# Altium PCB Pack_BMS_Module.PcbDoc
Units mm, origin at the board's own origin, x right, y up, seen from the top; angles counter-clockwise.
Board outline 100 x 100 mm, 2 copper layers (Top Layer, Bottom Layer); 94 components, 63 nets, 272 pads, 5 vias.
Unrouted connection lines stored in the file: 174.
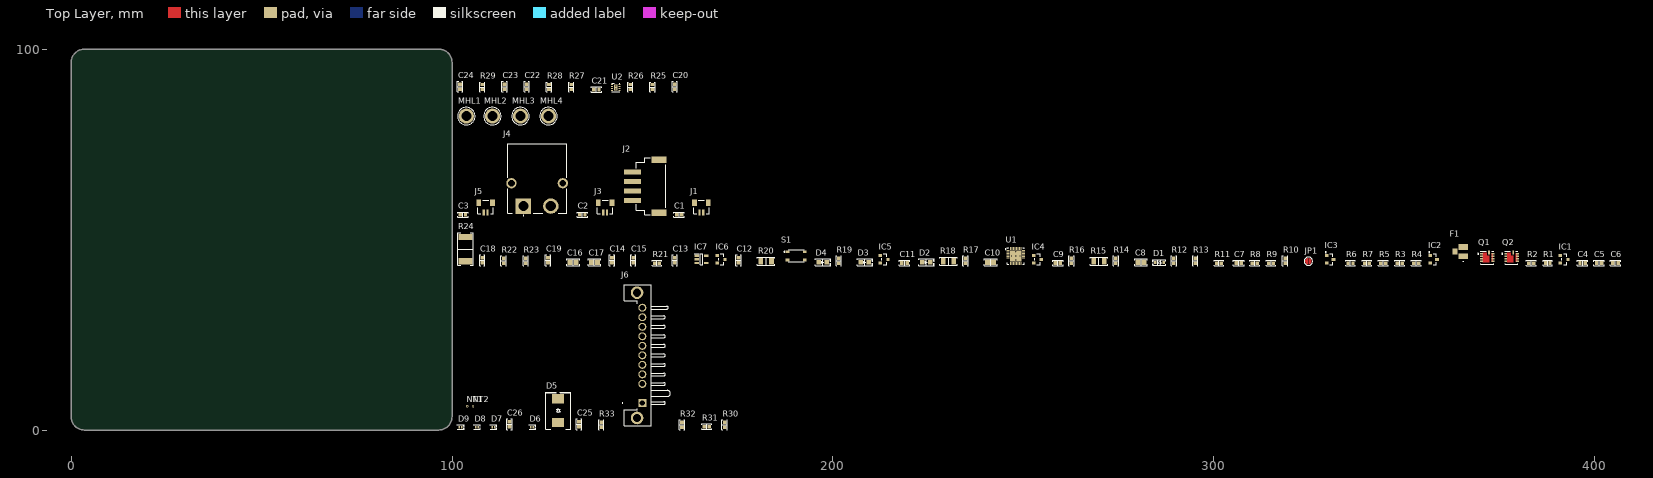
[diagram p0: Top Layer view]
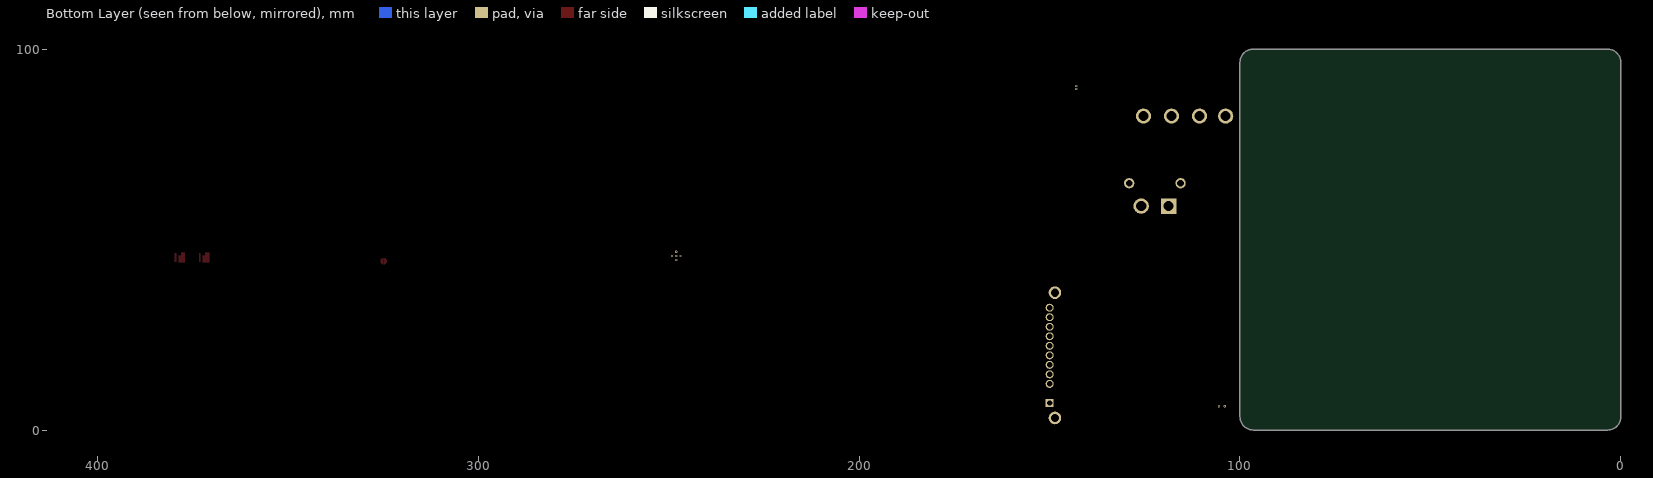
[diagram p1: Bottom Layer view, seen from below]

## Layer stack, top to bottom
Top Solder: solder mask 0.0102, Solder Resist, Dk 3.5
Top Layer: signal copper 0.0356
Dielectric 1: dielectric 0.32, FR-4, Dk 4.8
Bottom Layer: signal copper 0.0356
Bottom Solder: solder mask 0.0102, Solder Resist, Dk 3.5

## Board outline
0,3.479 0,96.521 cw(c3.479,96.521) 3.479,100 96.521,100 cw(c96.521,96.521) 100,96.521 100,3.479 cw(c96.521,3.479) 96.521,0 3.479,0 cw(c3.479,3.479)

## Design rules (kind name [scope] priority, off if disabled: settings)
BoardOutlineClearance [All] p1: gap=0.2 ignorepadtopadclearanceinfootprint=FALSE
Clearance "Stitching GND" [IsStitchingVia and InNet('GND') vs (IsVia and (Not IsStitchingVia)) Or IsPad] p1: gap=0.2 ignorepadtopadclearanceinfootprint=FALSE except(0.15: SMDPad-SMDPad; 0.28: Arc-Hole Track-Hole)
Clearance [All] p2: gap=0.2 ignorepadtopadclearanceinfootprint=FALSE except(0.15: SMDPad-SMDPad; 0.28: Arc-Hole Track-Hole)
HoleSize [All] p1: absolutevalues=TRUE maxlimit=6 minlimit=0.3 maxpercent=80.000 minpercent=20.000
HoleToHoleClearance HoleToHolePad [IsPad vs IsPad] p1: gap=0.45 allowstackedmicrovias=TRUE
HoleToHoleClearance HoleToHoleVia [IsVia vs IsVia] p2: gap=0.2 allowstackedmicrovias=TRUE
HoleToHoleClearance [All] p3: gap=0.3 allowstackedmicrovias=TRUE
MinimumAnnularRing MinimumViaAnnularRing [IsVia] p1: minimumring=0.15
MinimumAnnularRing [All] p2: minimumring=0.254
MinimumSolderMaskSliver [All] p1: minsoldermaskwidth=0.1
PlaneConnect [All] p1: planeconnectstyle=Relief reliefexpansion=0.508 reliefentries=4 reliefconductorwidth=0.32 reliefairgap=0.254
PolygonConnect MolexPwrGND [InNet('GND') vs IsPad And HasFootprint('43045-08YY_121314')] p1: connectstyle=Relief reliefconductorwidth=1 reliefentries=4 polygonreliefangle="90 Angle" conductorbypadedge=TRUE mindistance=0.381 enablemindistance=FALSE airgapwidth=0.35
PolygonConnect DRVTherrmalGND [InNet('GND') vs IsPad And HasFootprint('RXZ0016A-MFG')] p2: connectstyle=Direct reliefconductorwidth=0.254 reliefentries=4 polygonreliefangle="90 Angle" airgapwidth=0.254
PolygonConnect GNDStitchingDirect [InNet('GND')] p3: thpad.connectstyle=Relief thpad.reliefconductorwidth=0.32 thpad.reliefentries=4 thpad.polygonreliefangle="90 Angle" thpad.airgapwidth=0.254 thpad.conductorbypadedge=TRUE thpad.mindistance=0.381 thpad.enablemindistance=FALSE smdpad.connectstyle=Relief smdpad.reliefconductorwidth=0.32 smdpad.reliefentries=4 smdpad.polygonreliefangle="90 Angle" smdpad.airgapwidth=0.254 smdpad.conductorbypadedge=TRUE smdpad.mindistance=0.381 smdpad.enablemindistance=FALSE via.connectstyle=Direct via.reliefconductorwidth=0.254 via.reliefentries=4 via.polygonreliefangle="90 Angle" via.airgapwidth=0.254
PolygonConnect [All] p4: connectstyle=Relief reliefconductorwidth=0.32 reliefentries=4 polygonreliefangle="90 Angle" conductorbypadedge=TRUE mindistance=0.381 enablemindistance=FALSE airgapwidth=0.254
RoutingVias PowerVias [InNetClass('POWER') or InNet('GND')] p1: holewidth=0.5 width=0.8 viastyle="Through Hole" minholewidth=0.3 minwidth=0.6 maxholewidth=1.2 maxwidth=1.6
RoutingVias SignalVias [All] p2: holewidth=0.3 width=0.6 viastyle="Through Hole" minholewidth=0.3 minwidth=0.6 maxholewidth=0.5 maxwidth=0.8
SilkToSilkClearance [All] p1: silktosilkclearance=0.1
SilkToSolderMaskClearance [IsPad] p1: minsilkscreentomaskgap=0.1 clearancetoexposedcopper=TRUE
SolderMaskExpansion [All] p1: expansion=0.05 istentingtop=FALSE
SupplyNets "Schematic Supply Nets_5" [InNet('PACK+')] p1: voltage=12.60
SupplyNets "Schematic Supply Nets_4" [InNet('+3V3_LED')] p2: voltage=3.300
SupplyNets "Schematic Supply Nets_3" [InNet('GND')] p3: voltage=0.000
SupplyNets "Schematic Supply Nets_1" [InNet('PACK-')] p4: voltage=0.000
Width WidthPower [InNetClass('POWER') or InNet('GND')] p1: maxlimit=3 minlimit=0.2 preferedwidth=0.6
Width WidthSignal [All] p2: maxlimit=1 minlimit=0.2 preferedwidth=0.3
24 further rules are at their usual default settings.

## Classes and differential pairs
component class Pack_BMS_Module: MHL1 MHL2 MHL3 MHL4
net class TS[1..3]: TS1 TS2 TS3
component class SEC_PROT: C20 C21 C22 C23 C24 R25 R26 R27 R28 R29 U2
component class BATT_MGMT: C4 C5 C6 C7 C8 C9 C10 C11 C12 C13 C14 C15 C16 C17 C18 C19 D1 D2 D3 D4 F1 IC1 IC2 IC3 IC4 IC5 IC6 IC7 JP1 NT1 NT2 Q1 Q2 R1 R2 R3 R4 R5 R6 R7 R8 R9 R10 R11 R12 R13 R14 R15 R16 R17 R18 R19 R20 R21 R22 R23 R24 S1 U1
component class BATT_CONN: C25 C26 D5 D6 D7 D8 D9 J6 R30 R31 R32 R33
component class CELL_CONN: C1 C2 C3 J1 J2 J3 J4 J5

## Components (designator, comment, footprint, x,y, rotation, side; value= is the part's Value field where it differs from the comment)
C1 "100nF" "CAP 0603_1608" 159.639,56.515 r0 top
C2 "100nF" "CAP 0603_1608" 134.239,56.515 r0 top
C3 "100nF" "CAP 0603_1608" 102.87,56.515 r0 top
C4 "100nF" "CAP 0603_1608" 396.875,43.815 r0 top (schematic designator C6)
C5 "100nF" "CAP 0603_1608" 401.193,43.815 r0 top (schematic designator C7)
C6 "100nF" "CAP 0603_1608" 405.511,43.815 r0 top (schematic designator C8)
C7 "100nF" "CAP 0603_1608" 306.578,43.815 r0 top (schematic designator C9)
C8 "1µF" "CAP 0805_2012" 280.924,44.069 r0 top (schematic designator C10)
C9 "100nF" "CAP 0603_1608" 259.08,43.815 r0 top (schematic designator C11)
C10 "1µF" "CAP 0805_2012" 241.427,44.069 r0 top (schematic designator C12)
C11 "100nF" "CAP 0603_1608" 218.821,43.815 r0 top (schematic designator C13)
C12 "100nF" "CAP 0603_1608" 175.26,44.577 r90 top (schematic designator C14)
C13 "100nF" "CAP 0603_1608" 158.496,44.577 r90 top (schematic designator C15)
C14 "100nF" "CAP 0603_1608" 141.986,44.577 r90 top (schematic designator C16)
C15 "100nF" "CAP 0603_1608" 147.574,44.577 r90 top (schematic designator C17)
C16 "1µF" "CAP 0805_2012" 131.826,44.069 r0 top (schematic designator C18)
C17 "1µF" "CAP 0805_2012" 137.414,44.069 r0 top (schematic designator C19)
C18 "100nF" "CAP 0603_1608" 107.95,44.577 r90 top (schematic designator C20)
C19 "100nF" "CAP 0603_1608" 125.222,44.577 r90 top (schematic designator C21)
C20 "100nF" "CAP 0603_1608" 158.496,90.17 r90 top (schematic designator C22)
C21 "100nF" "CAP 0603_1608" 137.922,89.408 r0 top (schematic designator C23)
C22 "470nF" "CAP 0603_1608" 119.634,90.17 r90 top (schematic designator C24)
C23 "100nF" "CAP 0603_1608" 113.792,90.17 r90 top (schematic designator C25)
C24 "100nF" "CAP 0603_1608" 102.108,90.17 r90 top (schematic designator C26)
C25 "100nF" "CAP 0603_1608" 133.35,1.524 r90 top (schematic designator C4)
C26 "100nF" "CAP 0603_1608" 115.062,1.524 r90 top (schematic designator C5)
D1 "BAT54HT1G" "SOD323 IPC" 285.75,43.942 r0 top (schematic designator D6)
D2 "LED" "LED 0805_2012" 224.536,44.069 r0 top (schematic designator D7)
D3 "LED" "LED 0805_2012" 208.407,44.069 r0 top (schematic designator D8)
D4 "LED" "LED 0805_2012" 197.358,44.069 r0 top (schematic designator D9)
D5 "SMCJ13A" "DO214AB SMC" 127.889,5.08 r90 top (schematic designator D1)
D6 "TPD1E10B06DPYR" 0402 121.031,0.762 r0 top (schematic designator D2)
D7 "TPD1E10B06DPYR" 0402 110.871,0.762 r0 top (schematic designator D3)
D8 "TPD1E10B06DPYR" 0402 106.553,0.762 r0 top (schematic designator D4)
D9 "TPD1E10B06DPYR" 0402 102.235,0.762 r0 top (schematic designator D5)
F1 "ITV4030L1215" ITV4030L1215 364.744,46.863 r0 top
IC1 "FDN358P" "ON SEMI SOT-23-3" 392.049,44.831 r0 top
IC2 "IRLML6344TRPBF" "INFINEON SOT-23-3" 357.759,44.831 r0 top
IC3 "IRLML6344TRPBF" "INFINEON SOT-23-3" 330.581,44.831 r0 top
IC4 "DMN1019USN-7" "DIODES SOT-23-3" 253.746,44.831 r0 top
IC5 "DMN1019USN-7" "DIODES SOT-23-3" 213.487,44.831 r0 top
IC6 "DMN1019USN-7" "DIODES SOT-23-3" 170.688,44.831 r0 top
IC7 "TPS70933DBVR" SOT95P280X145-5N 165.481,44.831 r0 top
J1 "BM02B-SRSS-TB(LF)(SN)" "JST BM02B-SRSS-TB" 165.481,58.42 r0 top
J2 "S4B-XH-SM4-TB(LF)(SN)" "JST XH S4B-XH-SM4-TB" 152.146,64.008 r90 top
J3 "BM02B-SRSS-TB(LF)(SN)" "JST BM02B-SRSS-TB" 140.208,58.42 r0 top
J4 "XT60PW-M" XT60PWM 118.745,58.801 r0 top
J5 "BM02B-SRSS-TB(LF)(SN)" "JST BM02B-SRSS-TB" 108.839,58.42 r0 top
J6 "1746092-1" 17460921 149.987,7.112 r90 top
JP1 "Jumper Pad" Jumper_Pad 324.866,44.323 r0 top
MHL1 "Hole" Hole_2.6mm 103.759,82.423 r0 top
MHL2 "Hole" Hole_2.6mm 110.617,82.423 r0 top
MHL3 "Hole" Hole_2.6mm 117.983,82.423 r0 top
MHL4 "Hole" Hole_2.6mm 125.349,82.423 r0 top
NT1 "Net Tie" Net_Tie_Via 104.013,6.223 r90 top net-tie
NT2 "Net Tie" Net_Tie_Via 105.537,6.223 r90 top net-tie
Q1 "IQEH54NE2LM7UCG" IFX-PG-TTFN-9-1-V 371.856,45.466 r0 top
Q2 "IQEH54NE2LM7UCG" IFX-PG-TTFN-9-1-V 378.206,45.466 r0 top
R1 "10k" "NTC 0603_1608" 387.731,43.815 r0 top (schematic designator R5)
R2 "300R" "RES 0603_1608" 383.413,43.815 r0 top (schematic designator R6)
R3 "10M" "RES 0603_1608" 348.869,43.815 r0 top (schematic designator R7)
R4 "10M" "RES 0603_1608" 353.187,43.815 r0 top (schematic designator R8)
R5 "10M" "RES 0603_1608" 344.551,43.815 r0 top (schematic designator R9)
R6 "10k" "RES 0603_1608" 335.915,43.815 r0 top (schematic designator R10)
R7 "10k" "RES 0603_1608" 340.233,43.815 r0 top (schematic designator R11)
R8 "5.1k" "RES 0603_1608" 310.769,43.815 r0 top (schematic designator R12)
R9 "5.1k" "RES 0603_1608" 315.087,43.815 r0 top (schematic designator R13)
R10 "5.1k" "RES 0603_1608" 318.77,44.45 r90 top (schematic designator R14)
R11 "51k" "RES 0603_1608" 301.371,43.815 r0 top (schematic designator R15)
R12 "1k" "RES 0603_1608" 289.56,44.45 r90 top (schematic designator R16)
R13 "1k" "RES 0603_1608" 295.148,44.45 r90 top (schematic designator R17)
R14 "1k" "RES 0603_1608" 274.32,44.45 r90 top (schematic designator R18)
R15 "50R" "RES 1206_3216" 269.875,44.323 r0 top (schematic designator R19)
R16 "100R" "RES 0603_1608" 262.636,44.45 r90 top (schematic designator R20)
R17 "1k" "RES 0603_1608" 234.823,44.45 r90 top (schematic designator R21)
R18 "50R" "RES 1206_3216" 230.378,44.323 r0 top (schematic designator R22)
R19 "1k" "RES 0603_1608" 201.549,44.45 r90 top (schematic designator R23)
R20 "50R" "RES 1206_3216" 182.499,44.323 r0 top (schematic designator R24)
R21 "1k" "RES 0603_1608" 153.797,43.815 r0 top (schematic designator R25)
R22 "100R" "RES 0603_1608" 113.538,44.45 r90 top (schematic designator R26)
R23 "100R" "RES 0603_1608" 119.38,44.45 r90 top (schematic designator R27)
R24 "1 mOhms" "RES 2512_6432" 103.505,47.498 r90 top (schematic designator R28)
R25 "100R" "RES 0603_1608" 152.654,90.043 r90 top (schematic designator R29)
R26 "1k" "RES 0603_1608" 146.812,90.043 r90 top (schematic designator R30)
R27 "5.1R" "RES 0603_1608" 131.318,90.043 r90 top (schematic designator R31)
R28 "1k" "RES 0603_1608" 125.476,90.043 r90 top (schematic designator R32)
R29 "1k" "RES 0603_1608" 107.95,90.043 r90 top (schematic designator R33)
R30 "100R" "RES 0603_1608" 171.577,1.397 r90 top (schematic designator R1)
R31 "47R" "RES 0603_1608" 166.878,0.889 r0 top (schematic designator R2)
R32 "47R" "RES 0603_1608" 160.401,1.397 r90 top (schematic designator R3)
R33 "47R" "RES 0603_1608" 139.192,1.397 r90 top (schematic designator R4)
S1 "PTS815SJK250SMTRLFS" PTS815SJK250SMTRLFS 190.373,45.72 r0 top
U1 "BQ41Z50RSNR" QFN32_RSN_TEX 248.031,45.72 r0 top
U2 "BQ296100DSGR" DSG0008A 143.002,89.916 r0 top

## Footprints (in the part's own frame and the unit in brackets; to place one, negate y for a bottom-side part, rotate by r counter-clockwise, add the part's x,y. Pads: shape width x height; smd on the part's side, far side on the other; paste and mask are expansions set on the pad)
0402 [mm] "SODFL, 2-Leads, Body 0.675x1.075mm, IPC Medium Density"
  rect 0.4x0.7 smd: 1(-0.35,0) 2(0.35,0)
  silkscreen extent -0.8,-0.63 0.92,0.63, body extent -0.51,-0.31 0.5,0.3, height 0.45
17460921 [mm]
  rect 2.1x2.1 hole 1.4: 1(0,0)
  round 2.1 hole 1.4: 2(5,0) 3(7.5,0) 4(10,0) 5(12.5,0) 6(15,0) 7(17.5,0) 8(20,0) 9(22.5,0) 10(25,0)
  round 3.3 hole 2.2: 11(-3.95,1.4) 12(28.95,1.4)
  silkscreen extent -6.05,-7.35 31.05,5.3, body extent -6.05,-7.35 31.05,4.7, height 4.79
"CAP 0603_1608" [mm] "Chip Capacitor, 2-Leads, Body 1.60x0.80mm, IPC Medium Density"
  rect 0.9x1 smd: 1(-0.675,0) 2(0.675,0)
  silkscreen extent -1.4,-0.7 1.4,0.7, body extent -0.8,-0.41 0.8,0.41, height 0.82
"CAP 0805_2012" [mm] "Chip Capacitor, 2-Leads, Body 2.00x1.20mm, IPC Medium Density"
  rect 1.3x1.4 smd: 1(-0.8,0) 2(0.8,0)
  silkscreen extent -1.7,-0.9 1.7,0.9, body extent -1,-0.64 1,0.64, height 1.26
"DIODES SOT-23-3" [mm] "SOT23, 3-Leads, Body 2.90x2.40mm, Pitch 0.95mm, IPC Medium Density"
  rect 0.9x0.8 smd: 1(-1,0.95) 2(-1,-0.95) 3(1,0)
  silkscreen extent -0.7,-1.45 0.7,1.45, body extent -1.41,-1.45 1.41,1.45, height 1.5
"DO214AB SMC" [mm] "Molded Diode, 2-Leads, Body 6.85x5.90mm, IPC Medium Density"
  rect 2.45x3.15 smd: 1(-3.1,0) 2(3.1,0)
  silkscreen extent -4.9,-3.3 4.9,3.3, body extent -3.97,-2.95 3.97,2.95, height 2.6
DSG0008A [mm]
  rect 0.5x0.25 smd paste+0 mask+0.051: 1(-0.95,0.75) 2(-0.95,0.25) 3(-0.95,-0.25) 4(-0.95,-0.75) 5(0.95,-0.75) 6(0.95,-0.25) 7(0.95,0.25) 8(0.95,0.75)
  rect 0.9x1.6 smd paste-0.45 mask+0.051: 9(0,0)
  round 0.6 hole 0.3 paste-2539.97 mask+0.076: V(0,-0.4) V(0,0.4)
  silkscreen extent -1.07,-1.15 1.07,1.15, body extent -1,-1 1,1, height 0.77
Hole_2.6mm [mm] "2.6mm Hole with Exposed Ring"
  round 4 hole 2.6: 1(0,0)
  silkscreen extent -2.3,-2.3 2.3,2.3
IFX-PG-TTFN-9-1-V [mm] "TTFN-9-1, 0.65 mm pitch, 9 pin, 3.30mm L X 3.30mm W X 1.10mm H body"
  rect 0.71x0.35 smd paste-0.35 mask+0: 1(-1.528,-1.162) 1(-1.528,-0.513) 1(-1.528,0.138) 1(-1.528,0.787)
  rect 0.8x0.35 smd paste-0.4 mask+0: 2(1.528,-1.162) 2(1.528,-0.513) 2(1.528,0.138) 2(1.528,0.787)
  rect 0.45x1.1 smd paste-0.55 mask+0: 3(0.423,1.162)
  Top Layer region: 0.477,-1.392 -1.172,-1.392 -1.172,1.017 -0.188,1.017 -0.188,0.288 0.477,0.288
  Top Layer region: 1.128,0.963 1.478,0.963 1.478,-1.337 1.128,-1.337
  silkscreen extent -2.55,-1.9 1.7,1.5, body extent -1.62,-1.84 1.68,1.46, height 1.11
"INFINEON SOT-23-3" [mm] "SOT23, 3-Leads, Body 2.90x2.40mm, Pitch 0.95mm, IPC Medium Density"
  rect 0.972x0.802 smd: 1(-0.885,0.95) 2(-0.885,-0.95) 3(0.885,0)
  silkscreen extent -1.27,-1.5 0.7,1.95, body extent -1.16,-1.45 1.16,1.45, height 1
ITV4030L1215 [mm]
  rect 2.4x1.55 smd: 1(0.775,-1.225) 3(0.775,1.225)
  rect 1.2x1.6 smd: 2(-1.375,0)
  silkscreen extent 0.75,-2.7 0.85,-2.6, body extent -2,-1.85 2,1.85, height 1
"JST BM02B-SRSS-TB" [mm] "1.0mm pitch/Disconnectable Crimp style connector"
  rect 0.6x1.55 smd: 1(-0.5,-1.262) 2(0.5,-1.262)
  rect 1.2x1.8 smd: M(-1.8,1.262) M(1.8,1.262)
  silkscreen extent -2.03,-1.68 2.03,1.91, body extent -2,-1.69 2,1.91, height 4.32
"JST XH S4B-XH-SM4-TB" [mm] "CONN HEADER SMD R/A 4POS 2.5MM"
  rect 1.3x4.5 smd: 1(-3.75,4.75) 2(-1.25,4.75) 3(1.25,4.75) 4(3.75,4.75)
  rect 1.8x3.9 smd: M(-6.95,-2.25) M(6.95,-2.25)
  silkscreen extent -7.5,-4 7.5,3.75, body extent -7.47,-4 7.48,6, height 6
Jumper_Pad [mil] "Solderable Jumper Selector"
  round 1 smd: 1(-18.48,0) 2(18.48,0)
  silkscreen extent -43,-43 43,43
"LED 0805_2012" [mm] "Chip Diode, 2-Leads, Body 2.00x1.25mm, IPC Medium Density"
  rect 1.2x1.2 smd: 1(-1.05,0) 2(1.05,0)
  silkscreen extent -2.03,-0.9 2.03,0.9, body extent -1,-0.62 1,0.63, height 0.9
Net_Tie_Via [mm] "Net Tie, Via, 0.3mm Hole, 0.6mm Pad"
  round 0.6 hole 0.3: 1(0,0) 2(0,0)
"NTC 0603_1608" [mm] "NTC Thermistor, 2-Leads, Body 1.60x0.80mm, IPC Medium Density"
  rect 0.8x1 smd: 1(-0.625,0) 2(0.625,0)
  silkscreen extent -1.2,-0.7 1.2,0.7, body extent -0.8,-0.41 0.8,0.41, height 0.82
"ON SEMI SOT-23-3" [mm] "SOT23, 3-Leads, Body 2.90x2.40mm, Pitch 0.95mm, IPC Medium Density"
  rect 0.9x0.8 smd: 1(-1,0.95) 2(-1,-0.95) 3(1,0)
  silkscreen extent -0.7,-1.45 0.7,1.45, body extent -1.16,-1.45 1.16,1.45, height 1
PTS815SJK250SMTRLFS [mm]
  rect 1x0.7 smd: 1(-2.25,1.075) 1(2.25,1.075) 2(-2.25,-1.075) 2(2.25,-1.075)
  silkscreen extent -3.2,-1.6 2.07,1.6, body extent -2.3,-1.6 2.3,1.6, height 2.5
QFN32_RSN_TEX [mil]
  rect 29.81x8.03 smd: 1(-78.41,55.12) 2(-78.41,39.38) 3(-78.41,23.62) 4(-78.41,7.88) 5(-78.41,-7.88) 6(-78.41,-23.62) 7(-78.41,-39.38) 8(-78.41,-55.12) 17(78.41,-55.12) 18(78.41,-39.38) 19(78.41,-23.62) 20(78.41,-7.88) 21(78.41,7.88) 22(78.41,23.62) 23(78.41,39.38) 24(78.41,55.12)
  rect 8.03x29.81 smd: 9(-55.12,-78.41) 10(-39.38,-78.41) 11(-23.62,-78.41) 12(-7.88,-78.41) 13(7.88,-78.41) 14(23.62,-78.41) 15(39.38,-78.41) 16(55.12,-78.41) 25(55.12,78.41) 26(39.38,78.41) 27(23.62,78.41) 28(7.88,78.41) 29(-7.88,78.41) 30(-23.62,78.41) 31(-39.38,78.41) 32(-55.12,78.41)
  rect 114x114 smd: 33(0,0)
  silkscreen extent -109,-86 86,86, body extent -79,-79 79,79, height 31
"RES 0603_1608" [mm] "Chip Resistor, 2-Leads, Body 1.60x0.80mm, IPC Medium Density"
  rect 0.85x0.95 smd: 1(-0.65,0) 2(0.65,0)
  silkscreen extent -1.27,-0.7 1.27,0.7, body extent -0.8,-0.4 0.8,0.4, height 0.45
"RES 1206_3216" [mm] "Chip Resistor, 2-Leads, Body 3.13x1.55mm, IPC Medium Density"
  rect 1.2x1.65 smd: 1(-1.4,0) 2(1.4,0)
  silkscreen extent -2.3,-1.1 2.3,1.1, body extent -1.6,-0.8 1.6,0.8, height 0.6
"RES 2512_6432" [mm] "Chip Resistor, 2-Leads, Body 6.30x3.15mm, IPC Medium Density"
  rect 1.6x3.65 smd: 1(-3.175,0) 2(3.175,0)
  silkscreen extent -4.3,-2.05 4.3,2.05, body extent -3.15,-1.57 3.15,1.57, height 0.7
"SOD323 IPC" [mm] "SOD, 2-Leads, Body 1.25x2.50mm, IPC Medium Density"
  rect 0.625x0.83 smd: 1(-1.112,0) 2(1.112,0)
  silkscreen extent -1.78,-0.7 1.68,0.7, body extent -1.36,-0.62 1.36,0.63, height 1.05
SOT95P280X145-5N [mm]
  rect 1.2x0.6 smd: 1(-1.25,0.95) 2(-1.25,0) 3(-1.25,-0.95) 4(1.25,-0.95) 5(1.25,0.95)
  silkscreen extent -1.85,-1.45 0.3,1.5, body extent -1.4,-1.45 1.4,1.45, height 1.2
XT60PWM [mm]
  rect 4.05x4.05 hole 2.7: 1(0,0)
  round 4.05 hole 2.7: 2(7.2,0)
  round 2.7 hole 1.8: 3(-3.15,6) 3(10.35,6)
  silkscreen extent -4.15,-2.5 11.35,16.35, body extent -4.35,-1.82 11.55,16.38, height 8.61

## Part data
C1 C2 C3 C4 C5 C6 C7 C9 C11 C12 C13 C14 C15 C18 C19 C20 C21 C23 C24 C25 C26: library part GEN-CC100NT10V25KX7R603, "GENERIC 0603 MLC CAPACITOR", Dielectric=X7R, Tolerance=±10%, Voltage=25V, Part Number=GEN-CC100NT10V25KX7R603
C8 C10 C16 C17: library part GEN-CC1UT10V25KX7R805, "GENERIC 0805 MLC CAPACITOR", Dielectric=X7R, Tolerance=±10%, Voltage=25V, Part Number=GEN-CC1UT10V25KX7R805
C22: library part GEN-CC470NT10V16KX7R603, "GENERIC 0603 MLC CAPACITOR", Dielectric=X7R, Tolerance=±10%, Voltage=16V, Part Number=GEN-CC470NT10V16KX7R603
D1: "DIODE SCHOTTKY 30V 200MA SOD323", Capacitance @ Vr, F="10pF @ 1V, 1MHz", Current - Average Rectified (Io)="200mA (DC)", Current - Reverse Leakage @ Vr="2µA @ 25V", Manufacturer="ON Semiconductor", Operating Temperature - Junction="-55°C ~ 150°C", Package / Case="SC-76, SOD-323", Supplier Device Package=SOD-323, Supplier Part Number 1=BAT54HT1GOSCT-ND, Voltage - DC Reverse (Vr) (Max)=30V, Voltage - Forward (Vf) (Max) @ If="800mV @ 100mA", ComponentLink1Description=Datasheet, ComponentLink1URL=//media.digikey.com/pdf/Data%20Sheets/Fairchild%20PDFs/BAT54HT1G_Rev_1.2.pdf, ComponentLink2Description="DigiKey Link", ComponentLink2URL=http://digikey.com/product-detail/en/on-semiconductor/BAT54HT1G/BAT54HT1GOSCT-ND/917809, Diode Type=Schottky, LastUpdated="4/5/2026 8:59:27 PM", Lifecycle Status=Active, Minimum Order=1, Mounting Type="Surface Mount", Packaging=TapeAndReel, Part Number=BAT54HT1G, Part Status=Active, PartId=3080, Price=0.03, Reverse Recovery Time (trr)=5ns, Speed="Small Signal =< 200mA (Io), Any Speed", Supplier 1=DigiKey
D2: library part GEN-CILGRNLCLR805, "GENERIC 0805 INDICATOR LED", Color=Green, Lens Color=Clear, Part Number=GEN-CILGRNLCLR805
D3: library part GEN-CILAMBLCLR805, "GENERIC 0805 INDICATOR LED", Color=Amber, Lens Color=Clear, Part Number=GEN-CILAMBLCLR805
D4: library part GEN-CILREDLCLR805, "GENERIC 0805 INDICATOR LED", Color=Red, Lens Color=Clear, Part Number=GEN-CILREDLCLR805
D5: "TVS DIODE 13VWM 21.5VC DO214AB", Current - Peak Pulse (10/1000µs)=69.8A, Manufacturer="Littelfuse Inc.", Operating Temperature="-55°C ~ 150°C (TJ)", Package / Case="DO-214AB, SMC", Power - Peak Pulse="1500W (1.5kW)", Power Line Protection=No, Supplier Device Package="DO-214AB (SMCJ)", Supplier Part Number 1=SMCJ13ALFCT-ND, Voltage - Breakdown (Min)=14.4V, Voltage - Clamping (Max) @ Ipp=21.5V, Voltage - Reverse Standoff (Typ)=13V, Applications="General Purpose", ComponentLink1Description=Datasheet, ComponentLink1URL=https://www.littelfuse.com/products/tvs-diodes/surface-mount/~/media/electronics/datasheets/tvs_diodes/littelfuse_tvs_diode_smcj_datasheet.pdf.pdf, ComponentLink2Description="DigiKey Link", ComponentLink2URL=https://www.digikey.com/en/products/detail/littelfuse-inc/SMCJ13A/762378, LastUpdated="4/5/2026 8:33:56 PM", Lifecycle Status=Active, Minimum Order=1, Mounting Type="Surface Mount", Packaging=TapeAndReel, Part Number=SMCJ13A, Part Status=Active, PartId=6718, Price=0.16, Series=SMCJ, Supplier 1=DigiKey, Type=Zener, Unidirectional Channels=1
D6 D7 D8 D9: "TVS DIODE 5.5VWM 14VC 2X1SON", Current - Peak Pulse (10/1000µs)="5A (8/20µs)", Device Package="0402 (1005 Metric)", Manufacturer="Texas Instruments", Operating Temperature="-40°C ~ 125°C (TA)", Power - Peak Pulse=90W, Power Line Protection=No, Supplier Device Package="2-X1SON (1x.60)", Supplier Part Number 1=296-30406-1-ND, Voltage - Breakdown (Min)=6V, Voltage - Clamping (Max) @ Ipp=14V, Voltage - Reverse Standoff (Typ)="5.5V (Max)", Applications="General Purpose", Bidirectional Channels=1, ComponentLink1Description=Datasheet, ComponentLink1URL=http://www.ti.com/general/docs/suppproductinfo.tsp?distId=10&gotoUrl=http%3A%2F%2Fwww.ti.com%2Flit%2Fgpn%2Ftpd1e10b06, ComponentLink2Description="DigiKey Link", ComponentLink2URL=https://www.digikey.com/en/products/detail/texas-instruments/TPD1E10B06DPYR/3197744, LastUpdated="4/5/2026 9:01:53 PM", Lifecycle Status=Active, Minimum Order=1, Mounting Type="Surface Mount", Package / Case="0402 (1005 Metric)", Packaging=TapeAndReel, Part Number=TPD1E10B06DPYR, Part Status=Active, PartId=10446, Price=0.04, Series=-, Supplier 1=DigiKey, Type=Zener
F1: "FUSE BATTERY PROTECTOR 12V 15A", Current Rating=15A, Manufacturer="Littelfuse Inc.", Supplier Part Number 1=18-ITV4030L1215NRCT-ND, Voltage=36VDC, Part Number=ITV4030L1215, Response Time="Fast Blow", Supplier 1=DigiKey
IC1: "MOSFET P-CH 30V 1.5A SSOT3", Current - Continuous Drain (Id) @ 25°C="1.5A (Ta)", Drain to Source Voltage (Vdss)=30V, Drive Voltage (Max Rds On,  Min Rds On)="4.5V, 10V", Input Capacitance (Ciss) (Max) @ Vds="182pF @ 15V", Manufacturer="ON Semiconductor", Operating Temperature="-55°C ~ 150°C (TJ)", Package / Case="TO-236-3, SC-59, SOT-23-3", Power Dissipation (Max)="500mW (Ta)", Supplier Device Package=SuperSOT-3, Supplier Part Number 1=FDN358PCT-ND, ComponentLink1Description=Datasheet, ComponentLink1URL=https://www.onsemi.com/pub/Collateral/FDN358P-D.PDF, ComponentLink2Description="DigiKey Link", ComponentLink2URL=http://digikey.com/product-detail/en/on-semiconductor/FDN358P/FDN358PCT-ND/965606, FET Type=P-Channel, Gate Charge (Qg) (Max) @ Vgs="5.6nC @ 10V", LastUpdated="4/5/2026 8:53:33 PM", Lifecycle Status=Active, Minimum Order=1, Mounting Type="Surface Mount", Packaging=TapeAndReel, Part Number=FDN358P, Part Status=Active, Price=0.11, Rds On (Max) @ Id, Vgs="125mOhm @ 1.5A, 10V", Series=PowerTrench®, Supplier 1=DigiKey, Technology="MOSFET (Metal Oxide)", Vgs (Max)=±20V, Vgs(th) (Max) @ Id="3V @ 250µA"
IC2 IC3: "MOSFET N-CH 30V 5A MICRO3/SOT23", Current - Continuous Drain (Id) @ 25°C="5A (Ta)", Drain to Source Voltage (Vdss)="30 V", Drive Voltage (Max Rds On,  Min Rds On)="2.5V, 4.5V", Input Capacitance (Ciss) (Max) @ Vds="650 pF @ 25 V", Manufacturer="Infineon Technologies", Operating Temperature="-55°C ~ 150°C (TJ)", Package / Case="TO-236-3, SC-59, SOT-23-3", Power Dissipation (Max)="1.3W (Ta)", Supplier Device Package=Micro3™/SOT-23, Supplier Part Number 1=IRLML6344TRPBFCT-ND, ComponentLink1Description=Datasheet, ComponentLink1URL=https://www.infineon.com/dgdl/irlml6344pbf.pdf?fileId=5546d462533600a4015356689c44262c, ComponentLink2Description="DigiKey Link", ComponentLink2URL=https://www.digikey.com/en/products/detail/infineon-technologies/IRLML6344TRPBF/2538152, FET Type=N-Channel, Gate Charge (Qg) (Max) @ Vgs="6.8 nC @ 4.5 V", LastUpdated="4/5/2026 8:53:29 PM", Lifecycle Status=Active, Minimum Order=1, Mounting Type="Surface Mount", Packaging=TapeAndReel, Part Number=IRLML6344TRPBF, Part Status=Active, Price=0.09, Rds On (Max) @ Id, Vgs="29mOhm @ 5A, 4.5V", Series=HEXFET®, Supplier 1=DigiKey, Technology="MOSFET (Metal Oxide)", Vgs (Max)=±12V, Vgs(th) (Max) @ Id="1.1V @ 10µA"
IC4 IC5 IC6: "MOSFET N-CH 12V 9.3A SC59", Current - Continuous Drain (Id) @ 25°C="9.3A (Ta)", Drain to Source Voltage (Vdss)="12 V", Drive Voltage (Max Rds On,  Min Rds On)="1.2V, 2.5V", Input Capacitance (Ciss) (Max) @ Vds="2426 pF @ 10 V", Manufacturer="Diodes Incorporated", Operating Temperature="-55°C ~ 150°C (TJ)", Package / Case="TO-236-3, SC-59, SOT-23-3", Power Dissipation (Max)="680mW (Ta)", Supplier Device Package=SC-59-3, Supplier Part Number 1=DMN1019USN-7DICT-ND, ComponentLink1Description=Datasheet, ComponentLink1URL=https://www.diodes.com/assets/Datasheets/DMN1019USN.pdf, ComponentLink2Description="DigiKey Link", ComponentLink2URL=https://www.digikey.com/en/products/detail/diodes-incorporated/DMN1019USN-7/4898853, FET Type=N-Channel, Gate Charge (Qg) (Max) @ Vgs="50.6 nC @ 8 V", LastUpdated="4/5/2026 8:53:22 PM", Lifecycle Status=Active, Minimum Order=1, Mounting Type="Surface Mount", Packaging=TapeAndReel, Part Number=DMN1019USN-7, Part Status=Active, Price=0.10, Rds On (Max) @ Id, Vgs="10mOhm @ 9.7A, 4.5V", Series=-, Supplier 1=DigiKey, Technology="MOSFET (Metal Oxide)", Vgs (Max)=±8V, Vgs(th) (Max) @ Id="800mV @ 250µA"
IC7: "IC REG LINEAR 3.3V 150MA SOT23-5", Manufacturer="Texas Instruments", Supplier Part Number 1=296-35483-1-ND, Part Number=TPS70933DBVR, Supplier 1=DigiKey
J1 J3 J5: "CONN HEADER SMD 2POS 1MM", Current Rating (Amps)=0.7A, Insulation Color=Natural, Manufacturer="JST Sales America Inc.", Material Flammability Rating="UL94 V-0", Operating Temperature="-25°C ~ 85°C", Supplier Part Number 1=455-1788-1-ND, Voltage Rating=50V, ComponentLink1Description=Datasheet, ComponentLink1URL=http://www.jst-mfg.com/product/pdf/eng/eSR.pdf, ComponentLink2Description="DigiKey Link", ComponentLink2URL=http://digikey.com/product-detail/en/jst-sales-america-inc/BM02B-SRSS-TB-LF-SN/455-1788-1-ND/926859, Connector Type=Header, Contact Finish - Mating=Tin, Contact Finish - Post=Tin, Contact Material="Copper Alloy", Contact Shape=Square, Contact Type="Male Pin", Fastening Type=Push-Pull, Features="Solder Retention", Insulation Height="0.167\" (4.25mm)", Insulation Material="Polyamide (PA), Nylon", LastUpdated="1/12/2020 10:11:04 PM", Lifecycle Status=Active, Minimum Order=1, Mounting Type="Surface Mount", Number of Positions=2, Number of Positions Loaded=All, Number of Rows=1, Packaging=TapeAndReel, Part Number=BM02B-SRSS-TB(LF)(SN), Part Status=Active, PartId=12, Pitch - Mating="0.039\" (1.00mm)", Price=0.22, Series=SR, Shrouding="Shrouded - 4 Wall", Style="Board to Cable/Wire", Supplier 1=DigiKey, Termination=Solder
J2: "CONN HEADER SMD R/A 4POS 2.5MM", Current Rating (Amps)=3A, Insulation Color=Natural, Manufacturer="JST Sales America Inc.", Material Flammability Rating="UL94 V-0", Operating Temperature="-25°C ~ 85°C", Supplier Part Number 1=455-2262-1-ND, ComponentLink1Description=Datasheet, ComponentLink1URL=http://www.jst-mfg.com/product/pdf/eng/eXH.pdf, ComponentLink2Description="DigiKey Link", ComponentLink2URL=http://digikey.com/product-detail/en/jst-sales-america-inc/S4B-XH-SM4-TB-LF-SN/455-2262-1-ND/1651060, Connector Type=Header, Contact Finish - Mating=Tin, Contact Finish - Post=Tin, Contact Material="Copper Alloy", Contact Shape=Square, Contact Type="Male Pin", Fastening Type="Detent Lock", Features="Solder Retention", Insulation Height="0.236\" (6.00mm)", Insulation Material="Polyamide (PA6T), Nylon 6T", LastUpdated="8/29/2025 7:06:32 AM", Lifecycle Status=Active, Minimum Order=1, Mounting Type="Surface Mount, Right Angle", Number of Positions=4, Number of Positions Loaded=All, Number of Rows=1, Packaging=TapeAndReel, Part Number=S4B-XH-SM4-TB(LF)(SN), Part Status=Active, PartId=191, Pitch - Mating="0.098\" (2.50mm)", Price=0.49, Row Spacing - Mating="-25°C ~ 85°C", Series=XH, Shrouding="Shrouded - 4 Wall", Style="Board to Cable/Wire", Supplier 1=DigiKey, Termination=Solder
J4: "MALE XT60 PCB-MOUNT SOLDERABLE CONNECTOR", Manufacturer=AMASS, Part Number=XT60PW-M, Supplier 1=TME, Supplier Part Number 1=XT60PW-M
J6: "CONN PLUG 10POS 2.50MM R/A SLDR", Manufacturer="TE Connectivity AMP Connectors", Supplier Part Number 1=A107791-ND, Part Number=1746092-1, Supplier 1=DigiKey
JP1: library part GEN-PCBSJPS2, "CIRCULAR, SOLDERABLE JUMPER SELECTOR PAD", Part Number=GEN-PCBSJPS2, Size Variant=2mm
MHL1 MHL2 MHL3 MHL4: library part GEN-PCBMHL2S6, "CIRCULAR PCB MOUNTING HOLE", Part Number=GEN-PCBMHL2S6, Size Variant=2.6mm
NT1 NT2: library part GEN-PCBVINT0S3, "VIA STYLE CIRCULAR NET TIE", Part Number=GEN-PCBVINT0S3, Size Variant=0.3mm
Q1 Q2: "IGFET, N-CHANNEL, ENHANCEMENT, BODY DIODE", Manufacturer="Infineon Technologies", Supplier Part Number 1=448-IQEH54NE2LM7UCGATMA1CT-ND, Part Number=IQEH54NE2LM7UCG, Supplier 1=DigiKey
R1: library part NTCGS163JX103DT8, "NTC,10K,0.5%,0603,150C,AEC-Q200,", B Value Tolerance=±0.7%, Device Package="0603 (1608 Metric)", Manufacturer="TDK Corporation", Operating Temperature="-55°C ~ 150°C", Power - Max="125 mW", Resistance Tolerance=±0.5%, Supplier Part Number 1=445-NTCGS163JX103DT8CT-ND, B25/50=3380K, B25/75=3422K, B25/85=3435K, B25/100=3453K, ComponentLink1Description=Datasheet, ComponentLink1URL=https://product.tdk.com/system/files/dam/doc/product/sensor/ntc/chip-ntc-thermistor/catalog/tpd_automotive_ntc-thermistor_ntcgs_en.pdf, ComponentLink2Description="DigiKey Link", ComponentLink2URL=https://www.digikey.com/en/products/detail/tdk-corporation/NTCGS163JX103DT8/22260965, LastUpdated="4/5/2026 8:42:58 PM", Lifecycle Status=Active, Minimum Order=1, Mounting Type="Surface Mount", Package / Case="0603 (1608 Metric)", Packaging=TapeAndReel, Part Number=NTCGS163JX103DT8, PartId=2194, Price=0.15, Resistance in Ohms @ 25°C=10k, Series=NTCGS, Supplier 1=DigiKey
R2: library part GEN-CRR300T5P8603, "GENERIC 0603 CHIP RESISTOR", Power=0.125W, Tolerance=±5%, Part Number=GEN-CRR300T5P8603
R3 R4 R5: library part GEN-CRR10MT5P8603, "GENERIC 0603 CHIP RESISTOR", Power=0.125W, Tolerance=±5%, Part Number=GEN-CRR10MT5P8603
R6 R7: library part GEN-CRR10KT5P8603, "GENERIC 0603 CHIP RESISTOR", Power=0.125W, Tolerance=±5%, Part Number=GEN-CRR10KT5P8603
R8 R9 R10: library part GEN-CRR5K1T5P8603, "GENERIC 0603 CHIP RESISTOR", Power=0.125W, Tolerance=±5%, Part Number=GEN-CRR5K1T5P8603
R11: library part GEN-CRR51KT5P8603, "GENERIC 0603 CHIP RESISTOR", Power=0.125W, Tolerance=±5%, Part Number=GEN-CRR51KT5P8603
R12 R13 R14 R17 R19 R21 R26 R28 R29: library part GEN-CRR1KT1P8603, "GENERIC 0603 CHIP RESISTOR", Power=0.125W, Tolerance=±1%, Part Number=GEN-CRR1KT1P8603
R15 R18 R20: library part GEN-CRR50T1P11206, "GENERIC 1206 CHIP RESISTOR", Power=1W, Tolerance=±1%, Part Number=GEN-CRR50T1P11206
R16 R22 R23 R25 R30: library part GEN-CRR100T1P8603, "GENERIC 0603 CHIP RESISTOR", Power=0.125W, Tolerance=±1%, Part Number=GEN-CRR100T1P8603
R24: library part TLR3A20DR001FTDG, "RES 0.001 OHM 1% 2W 2512", Device Package="2512 (6432 Metric)", Manufacturer="TE Connectivity Passive Product", Operating Temperature="-55°C ~ 170°C", Power (Watts)=2W, Supplier Device Package=2512, Supplier Part Number 1=A129565CT-ND, Temperature Coefficient=±50ppm/°C, Tolerance=±1%, ComponentLink1Description=Datasheet, ComponentLink1URL=https://www.te.com/commerce/DocumentDelivery/DDEController?Action=srchrtrv&DocNm=1773449-3&DocType=DS&DocLang=English, ComponentLink2Description="DigiKey Link", ComponentLink2URL=http://digikey.com/product-detail/en/te-connectivity-passive-product/TLR3A20DR001FTDG/A129565CT-ND/8566769, Composition="Metal Foil", Features="Current Sense", Height - Seated (Max)="0.024\" (0.60mm)", LastUpdated="9/2/2020 1:27:06 AM", Lifecycle Status=Active, Minimum Order=1, Number of Terminations=2, Package / Case="2512 (6432 Metric)", Packaging=TapeAndReel, Part Number=TLR3A20DR001FTDG, Part Status=Active, Price=0.30, Resistance="1 mOhms", Series="TLR, CGS", Size / Dimension="0.252\" L x 0.126\" W (6.40mm x 3.20mm)", Supplier 1=DigiKey
R27: library part GEN-CRR5R1T1P8603, "GENERIC 0603 CHIP RESISTOR", Power=0.125W, Tolerance=±1%, Part Number=GEN-CRR5R1T1P8603
R31 R32 R33: library part GEN-CRR47T1P8603, "GENERIC 0603 CHIP RESISTOR", Power=0.125W, Tolerance=±1%, Part Number=GEN-CRR47T1P8603
S1: "SWITCH TACTILE SPST-NO 0.05A 12V", Manufacturer=C&K, Supplier Part Number 1=CKN12216-1-ND, Circuit=SPST-NO, Part Number=PTS815SJK250SMTRLFS, Supplier 1=DigiKey
U1: "2 TO 4 SERIES LI-ION HIGHLY INTE", Manufacturer="Texas Instruments", Supplier Part Number 1=296-BQ41Z50RSNRCT-ND, Copyright="Copyright (C) 2025 Ultra Librarian. All rights reserved.", Part Number=BQ41Z50RSNR, Supplier 1=DigiKey
U2: "IC BATT PROT LI-ION 2-4CEL 8WSON", Manufacturer="Texas Instruments", Supplier Part Number 1=296-50964-1-ND, Part Number=BQ296100DSGR, Supplier 1=DigiKey

## Via types
v1: diameter 0.6, hole 0.3, Top Layer to Bottom Layer, 5 vias

## Nets (pads, with @x,y where several pads share a name; then routed paths per layer and width w, separated by ;. In a path a pad name is that pad's centre, name@x,y a point inside that pad or via, vN(x,y) a via of type N, cw(c..) or ccw(c..) an arc to the next point about the centre after c; other vN are vias at no path point)
+3V3_LED: C15.2 D2.1 D3.1 D4.1 IC7.5
ALERT_PR: D7.2 J6.7 R31.2
BC1: IC5.2 J2.3 R19.1 R20.2 R29.1
BC2: IC4.2 J2.2 R17.1 R18.2 R28.1
BC3: J2.1 R14.1 R15.2 R25.2 R26.1
BNEG: IC6.2 J2.4 R21.1
FUSE: R12.1 U2.8
GND: C1.1 C2.1 C3.1 C4.2 C8.1 C10.2 C16.1 C17.1 C20.1 C22.1 C24.1 J1.2 J3.2 J5.2 NT1.2 NT2.2 R1.1 S1.2 U1.11 U1.33 U2.6 U2.9
  other v1: 248.031,44.62 246.931,45.72 248.031,45.72 249.131,45.72 248.031,46.82
LED_A: D4.2 U1.3
LED_B: D3.2 U1.4
LED_C: D2.2 U1.8
NetC5_1: C5.1 C6.2
NetC5_2: C5.2 F1.3 Q1.1 R2.1 R3.2
NetC7_2: C7.2 IC3.1 JP1.1 R11.2
NetC8_2: C8.2 D1.1 U1.18
NetC9_1: C9.1 C11.2 IC4.1 R17.2 U1.21
NetC9_2: C9.2 R14.2 U1.19 U1.20
NetC10_1: C10.1 R16.2 U1.14
NetC11_1: C11.1 C12.2 IC5.1 R19.2 U1.22
NetC12_1: C12.1 IC6.1 R21.2 U1.23
NetC13_1: C13.1 C19.2 R23.2 U1.25
NetC13_2: C13.2 C18.2 R22.2 U1.24
NetC16_2: C16.2 U1.31
NetC17_2: C17.2 U1.30
NetC20_2: C20.2 R25.1 U2.1
NetC21_1: C21.1 C23.2 R28.2 U2.4
NetC21_2: C21.2 R26.2 U2.2 U2.3
NetC22_2: C22.2 R27.2
NetC23_1: C23.1 C24.2 R29.2 U2.5
NetC25_1: C25.1 C26.2
NetF1_2: F1.2 IC3.3
NetIC1_1: IC1.1 R4.1 R9.2
NetIC1_2: IC1.2 Q1.2 Q2.2 R4.2 R16.1
NetIC1_3: IC1.3 R2.2
NetIC2_1: IC2.1 R6.2
NetIC2_3: IC2.3 Q2.3 R5.1 R10.2
NetIC4_3: IC4.3 R15.1
NetIC5_3: IC5.3 R18.1
NetIC6_3: IC6.3 R20.1
NetJP1_2: JP1.2 R12.2 R13.1
NetQ1_3: Q1.3 R3.1 R8.2
NetR7_1: R7.1 U1.15
NetR8_1: R8.1 U1.17
NetR9_1: R9.1 U1.13
NetR10_1: R10.1 U1.16
NetR13_2: R13.2 U1.12
NetR27_1: R27.1 U2.7
NetS1_1: S1.1 U1.32
PACK+: C6.1 C25.2 D5.2 IC2.2 J6.8 J6.9 J6.10 Q2.1 R5.2 R7.2
PACK-: C14.1 C15.1 C19.1 C26.1 D5.1 D6.1 D7.1 D8.1 D9.1 IC7.2 J6.1 J6.2 J6.3 R6.1 R23.1 R24.2
PPW_N: C7.1 C18.1 IC3.2 J4.1 NT1.1 NT2.1 R11.1 R22.1 R24.1
PPW_P: C14.2 D1.2 F1.1 IC7.1 J4.2
PRES: R30.2 U1.7
PRES_PR: D6.2 J6.4 R30.1
SMB.ALERT: R31.1 U1.5
SMB.SCL: R33.1 U1.2
SMB.SDA: R32.1 U1.1
SMBC_PR: D9.2 J6.5 R33.2
SMBD_PR: D8.2 J6.6 R32.2
TS1: C1.2 J1.1 U1.26
TS2: C2.2 J3.1 U1.27
TS3: C3.2 J5.1 U1.28
TS4: C4.1 R1.2 U1.29
pads on no net: IC7.3 IC7.4 J1.M J2.M J3.M J4.3 J5.M J6.11 J6.12 MHL1.1 MHL2.1 MHL3.1 MHL4.1 U1.6 U1.9 U1.10 U2.V

## Other copper
Top Layer:
  region net NetJP1_2: 325.005,43.535 325.005,45.111 cw(c324.866,44.323)
  region net NetC7_2: 324.727,43.535 cw(c324.866,44.323) 324.727,45.111

## Silkscreen, mask and mechanical layers (free items; w line width, h text height)
Mechanical 1:
  the board outline again, w0.254